# Altium PCB HalfPCB1.PcbDoc
Units mm, origin at the board's own origin, x right, y up, seen from the top; angles counter-clockwise.
Board outline 50 x 25 mm, 4 copper layers (Top Layer, Mid-Layer 1, Mid-Layer 2, Bottom Layer); 35 components, 0 nets, 135 pads, 64 vias.
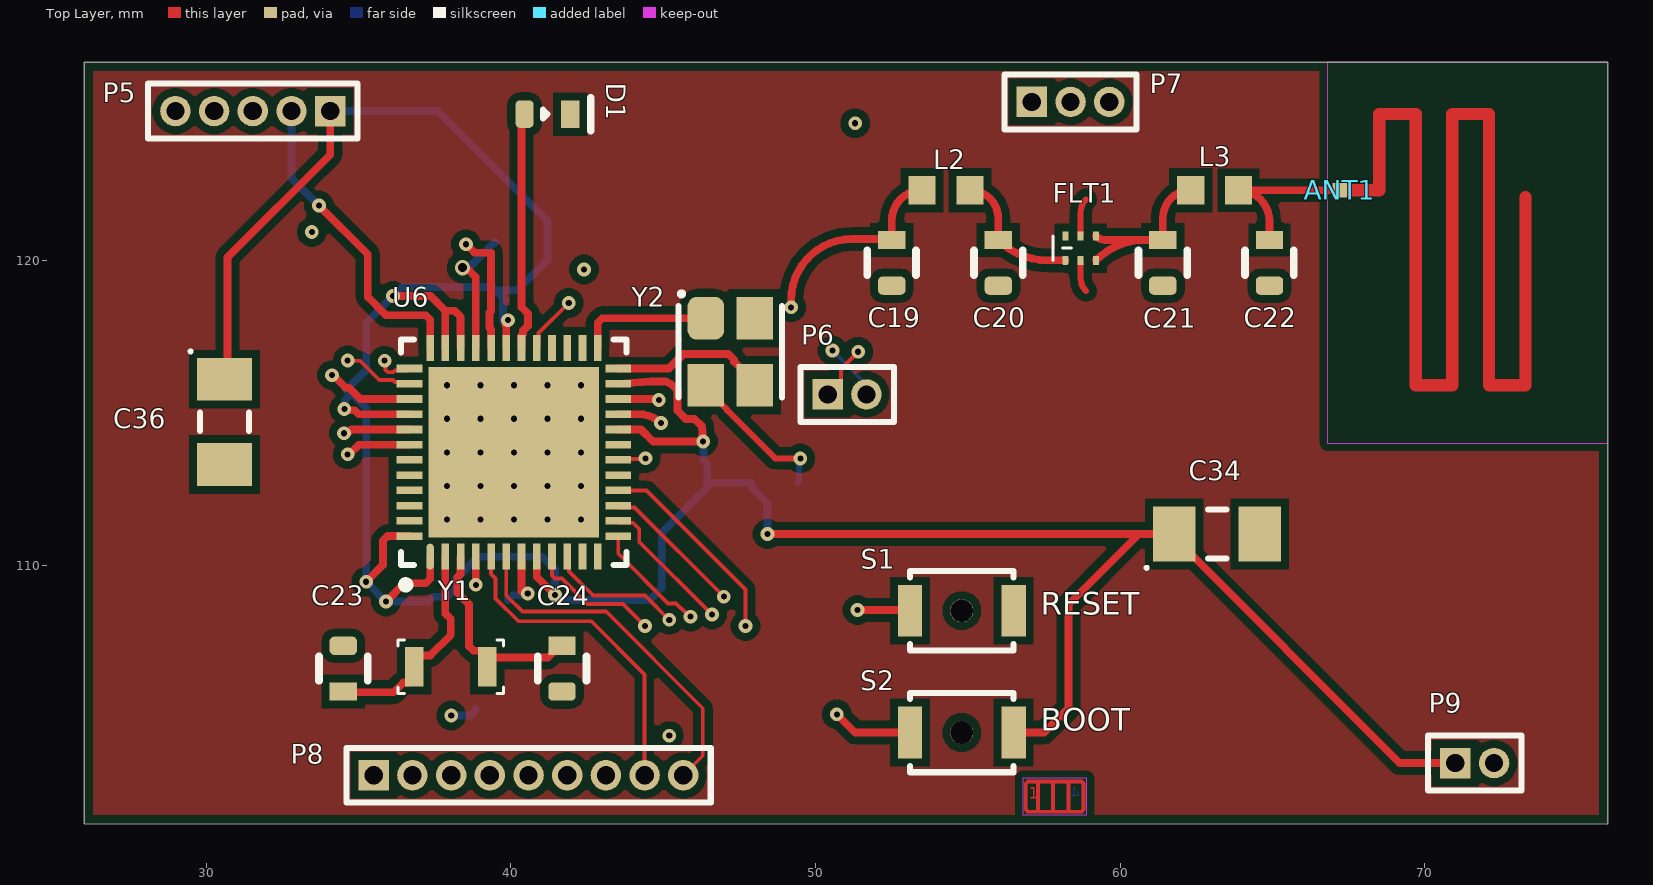
[diagram p0: Top Layer view]
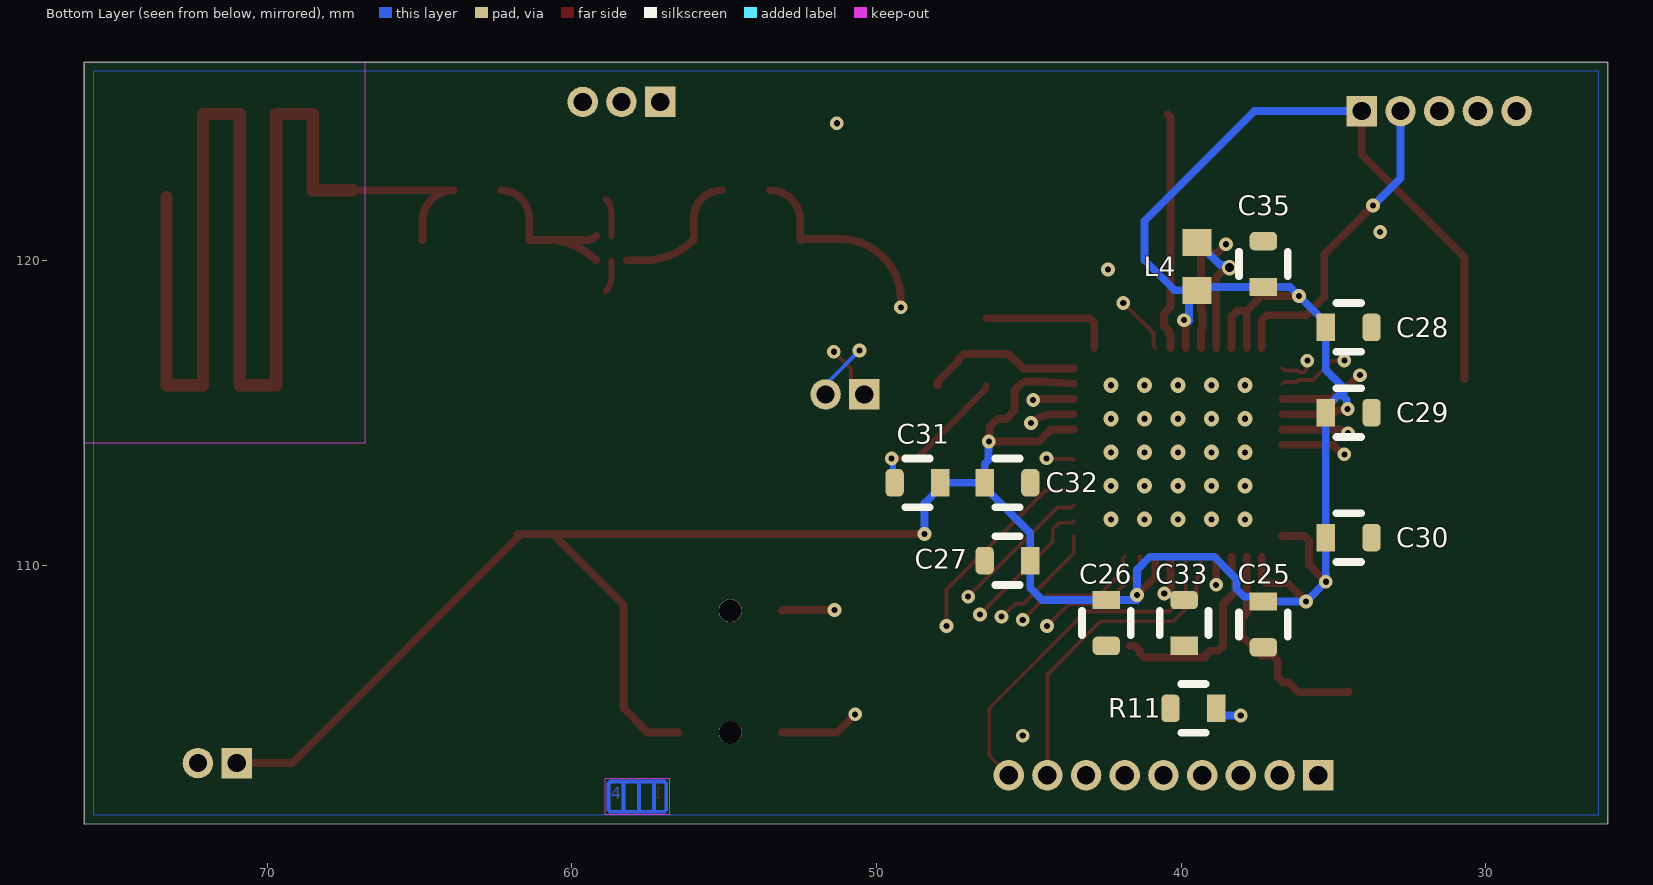
[diagram p1: Bottom Layer view, seen from below]
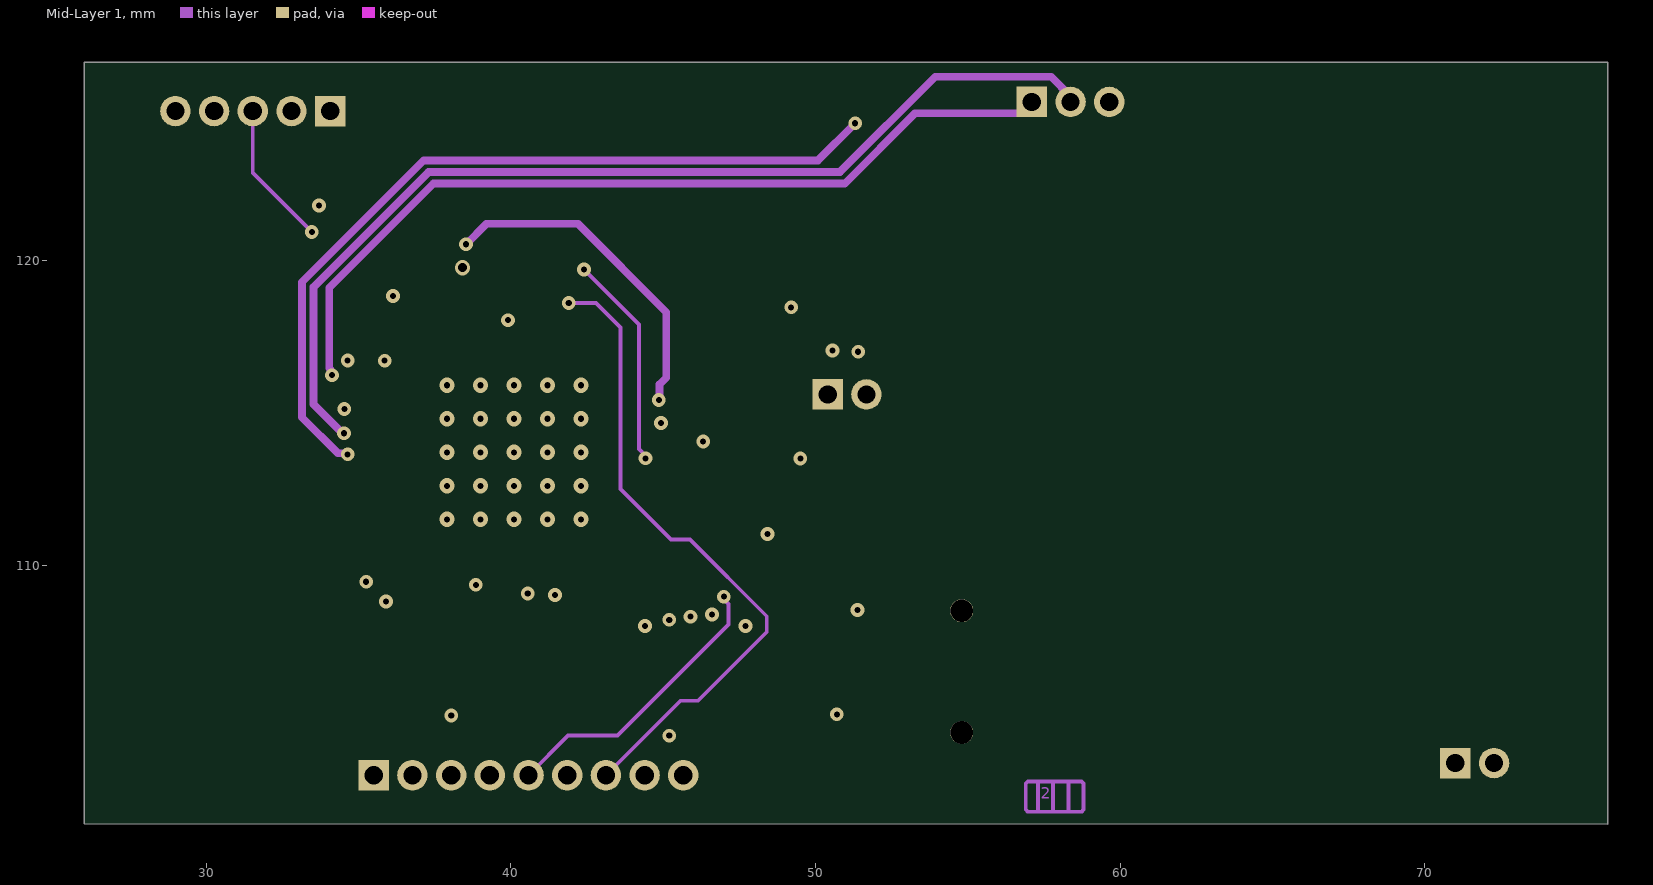
[diagram p2: Mid-Layer 1]
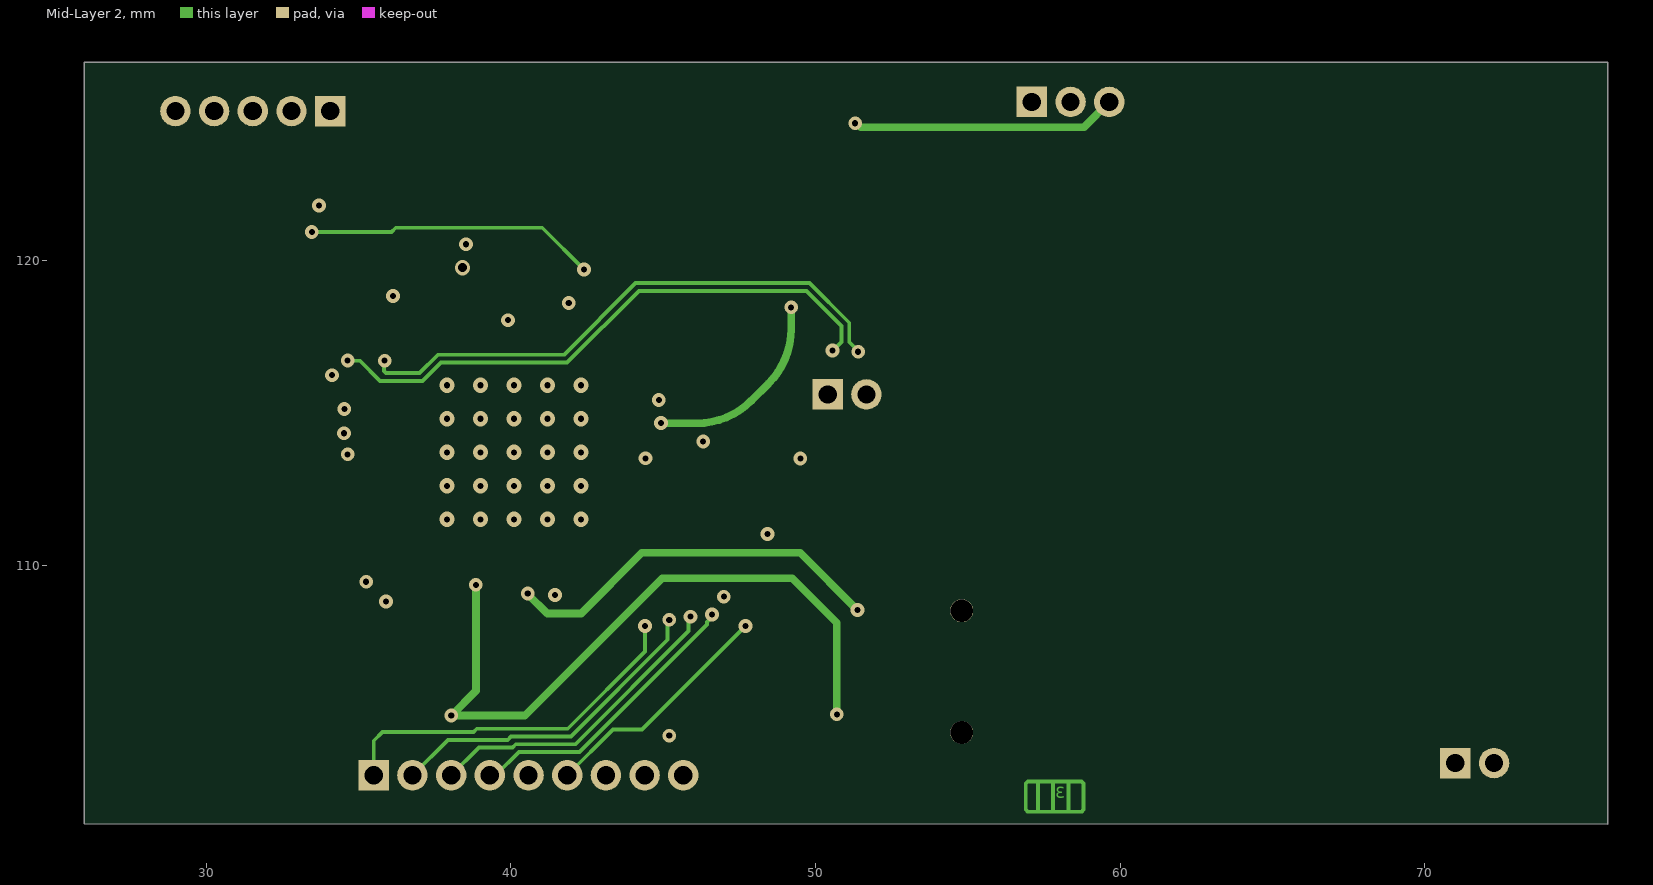
[diagram p3: Mid-Layer 2]

## Layer stack, top to bottom
Top Solder: solder mask 0.0102, Solder Resist, Dk 3.5
Top Layer: signal copper 0.0356
Dielectric 1: dielectric 0.32, FR-4, Dk 4.8
Mid-Layer 1: signal copper 0.0356
Dielectric2: dielectric 0.32, FR-4, Dk 4.8
Mid-Layer 2: signal copper 0.0356
Dielectric3: dielectric 0.32, FR-4, Dk 4.8
Bottom Layer: signal copper 0.0356
Bottom Solder: solder mask 0.0102, Solder Resist, Dk 3.5

## Board outline
26,101.5 76,101.5 76,126.5 26,126.5

## Design rules (kind name [scope] priority, off if disabled: settings)
Clearance [All] p1: gap=0.254 ignorepadtopadclearanceinfootprint=FALSE except(0: Arc-Hole Track-Hole SMDPad-Hole THPad-Hole Via-Hole Fill-Hole Poly-Hole Region-Hole Text-Hole)
PolygonConnect [All] p1: connectstyle=Relief reliefconductorwidth=0.254 reliefentries=4 polygonreliefangle="90 Angle" airgapwidth=0.254
RoomDefinition U_STM32WB55 [InComponentClass('U_STM32WB55')] p1: confinementstyle=ConfineIn formatcopy=TRUE lockcomponents=FALSE outline 25.9,101.8 73.8,101.8 73.8,126.5 25.9,126.5
RoutingVias [All] p1: holewidth=0.711 width=1.27 viastyle="Through Hole" minholewidth=0.711 minwidth=1.27 maxholewidth=0.711 maxwidth=1.27
SolderMaskExpansion [All] p1: expansion=0.102 istentingtop=FALSE
Width [All] p1: maxlimit=0.254 minlimit=0.254 preferedwidth=0.254
30 further rules are at their usual default settings.

## Components (designator, comment, footprint, x,y, rotation, side; value= is the part's Value field where it differs from the comment)
ANT1 "Meander Antenna 2.4GHz" Meander2.4G 67.2,122.3 r270 top
C19 "0.8pF" C_0603 52.5,119.921 r90 top
C20 "0.3pF" C_0603 56,119.921 r90 top
C21 "Not Fitted" C_0603 61.4,119.921 r90 top
C22 "1.2pF" C_0603 64.9,119.921 r90 top
C23 "20pF" C_0603 34.5,106.6 r270 top
C24 "20pF" C_0603 41.679,106.6 r90 top
C25 "100nF" C_0603 37.3,108.05 r90 bottom
C26 "100nF" C_0603 42.454,108.1 r90 bottom
C27 "100nF" C_0603 45.7,110.146 r180 bottom
C28 "100nF" C_0603 34.5,117.8 r0 bottom
C29 "100nF" C_0603 34.5,115 r0 bottom
C30 "100nF" C_0603 34.5,110.9 r0 bottom
C31 "100nF" C_0603 48.654,112.7 r180 bottom
C32 "100pF" C_0603 45.7,112.7 r0 bottom
C33 "100nF" C_0603 39.9,108.1 r270 bottom
C34 "4.7uF" C_1206 63.179,111.021 r180 top
C35 "100nF" C_0603 37.3,119.879 r270 bottom
C36 "4.7uF" C_1206 30.6,114.7 r90 top
D1 "RED" D-0603 41.2,124.8 r0 top
FLT1 "LFB182G45BG4D268" LFB182G45BG4D268 58.7,120.4 r0 top
L2 "2.7nH" L-0603 54.285,122.3 r0 top
L3 "3.6nH" L-0603 63.1,122.3 r0 top
L4 "10uH" L-0603 39.479,119.8 r270 bottom
P5 "Programmer" MHDR1X5 34.07,124.9 r180 top
P6 "UART" MHDR1X2 50.4,115.6 r0 top
P7 "BAT" MHDR1X3 57.1,125.2 r0 top
P8 "MHDR1X9" MHDR1X9 35.5,103.1 r0 top
P9 "PWR" MHDR1X2 71,103.5 r0 top
R11 "10K" C_0603 39.6,105.296 r180 bottom
S1 "NRESET" B3U-1000P-B 54.8,108.5 r0 top
S2 "BOOT" B3U-1000P-B 54.8,104.5 r0 top
U6 "STM32WB55Cx" QFN48P50S700x700EP560x560 40.1,113.7 r90 top
Y1 "32.768kHz" ECX-31B 38.027,106.665 r0 top
Y2 "32MHz" Y_3225 47.2,117 r270 top

## Footprints (in the part's own frame and the unit in brackets; to place one, negate y for a bottom-side part, rotate by r counter-clockwise, add the part's x,y. Pads: shape width x height; smd on the part's side, far side on the other; paste and mask are expansions set on the pad)
B3U-1000P-B [mm] "tactile Switch"
  rect 0.8x1.7 smd: 1(-1.7,0) 2(1.7,0)
  round 0.75 hole 0.75: ""(0,0)
  silkscreen extent -1.7,-1.3 1.7,1.3, body extent -2,-1.25 2,1.25, height 1.6
C_0603 [mm] "0603 package for CAP"
  rrect50% 0.6x0.9 smd: 1(-0.75,0)
  rect 0.6x0.9 smd: 2(0.75,0)
  silkscreen extent -0.4,-0.8 0.4,0.8, body extent -0.8,-0.4 0.8,0.4, height 0.5
C_1206 [mm]
  rect 1.4x1.8 smd: 1(-1.4,0) 2(1.4,0)
  silkscreen extent -0.3,-0.8 2.36,1.16, body extent -1.75,-0.9 1.75,0.9, height 1.6
D-0603 [mm] "0603 package for LED"
  rrect50% 0.6x0.9 smd: 1(-0.75,0)
  rect 0.6x0.9 smd: 2(0.75,0)
  silkscreen extent -0.15,-0.54 1.42,0.54, body extent -0.83,-0.36 0.83,0.37, height 0.68
ECX-31B [mm] "Crystal Oscillator 2Pins 3.2x1.5"
  rect 0.6x1.3 smd: 1(-1.2,0) 2(1.2,0)
  silkscreen extent -1.73,-0.87 1.73,0.87, body extent -1.6,-0.75 1.6,0.75, height 0.9
L-0603 [mm] "Chip Inductor, 2-Leads, Body 1.60x0.80mm, IPC Medium Density"
  rect 0.89x0.94 smd: 1(-0.785,0) 2(0.785,0)
  body extent -0.85,-0.45 0.85,0.45, height 0.95
LFB182G45BG4D268 [mm]
  rrect50% 0.2x0.3 smd: 1(-0.5,-0.4)
  rect 0.2x0.3 smd: 2(0,-0.4) 3(0.5,-0.4) 4(0.5,0.4) 5(0,0.4) 6(-0.5,0.4)
  silkscreen extent -0.9,-0.4 -0.3,0.4, body extent -0.8,-0.4 0.8,0.4, height 0.39
Meander2.4G [mm]
  rect 0.48x0.48 smd mask+0.05: 1(0,0)
  Top Layer lines w0.4: 0,0 0,1.3 -2.5,1.3 -2.5,2.5 6.4,2.5 6.4,3.7 -2.5,3.7 -2.5,4.9 6.4,4.9 6.4,6.1 0.225,6.1
MHDR1X2 [mm] "Connector; Header; 2 Position"
  rect 1x1 hole 0.6: 1(0,0)
  round 1 hole 0.6: 2(1.27,0)
  silkscreen extent -0.9,-0.9 2.17,0.9
MHDR1X3 [mm] "Connector; Header; 3 Position"
  rect 1x1 hole 0.6: 1(0,0)
  round 1 hole 0.6: 2(1.27,0) 3(2.54,0)
  silkscreen extent -0.9,-0.9 3.44,0.9
MHDR1X5 [mm] "Connector; Header; 5 Position"
  rect 1x1 hole 0.6: 1(0,0)
  round 1 hole 0.6: 2(1.27,0) 3(2.54,0) 4(3.81,0) 5(5.08,0)
  silkscreen extent -0.9,-0.9 5.98,0.9
MHDR1X9 [mm] "Connector; Header; 9 Position"
  rect 1x1 hole 0.6: 1(0,0)
  round 1 hole 0.6: 2(1.27,0) 3(2.54,0) 4(3.81,0) 5(5.08,0) 6(6.35,0) 7(7.62,0) 8(8.89,0) 9(10.16,0)
  silkscreen extent -0.9,-0.9 11.06,0.9
QFN48P50S700x700EP560x560 [mm] "QFN, 48-Leads, Body 7.00x7.00mm, Pitch 0.50mm, Thermal Pad 5.60x5.60mm, IPC Medium Density"
  oval 0.85x0.25 smd: 1(-3.425,2.75)
  rect 0.85x0.25 smd: 2(-3.425,2.25) 3(-3.425,1.75) 4(-3.425,1.25) 5(-3.425,0.75) 6(-3.425,0.25) 7(-3.425,-0.25) 8(-3.425,-0.75) 9(-3.425,-1.25) 10(-3.425,-1.75) 11(-3.425,-2.25) 12(-3.425,-2.75) 25(3.425,-2.75) 26(3.425,-2.25) 27(3.425,-1.75) 28(3.425,-1.25) 29(3.425,-0.75) 30(3.425,-0.25) 31(3.425,0.25) 32(3.425,0.75) 33(3.425,1.25) 34(3.425,1.75) 35(3.425,2.25) 36(3.425,2.75)
  rect 0.25x0.85 smd: 13(-2.75,-3.425) 14(-2.25,-3.425) 15(-1.75,-3.425) 16(-1.25,-3.425) 17(-0.75,-3.425) 18(-0.25,-3.425) 19(0.25,-3.425) 20(0.75,-3.425) 21(1.25,-3.425) 22(1.75,-3.425) 23(2.25,-3.425) 24(2.75,-3.425) 37(2.75,3.425) 38(2.25,3.425) 39(1.75,3.425) 40(1.25,3.425) 41(0.75,3.425) 42(0.25,3.425) 43(-0.25,3.425) 44(-0.75,3.425) 45(-1.25,3.425) 46(-1.75,3.425) 47(-2.25,3.425) 48(-2.75,3.425)
  rect 5.6x5.6 smd: 49(0,0)
  silkscreen extent -4.47,-3.7 3.7,3.7, body extent -3.55,-3.55 3.55,3.55, height 0.6
Y_3225 [mm] "Crystal, 4-Leads, Body 2.50x3.20mm, Pitch 2.20mm, IPC Low Density"
  rrect50% 1.4x1.2 smd: 1(-1.1,-0.8)
  rect 1.4x1.2 smd: 2(1.1,-0.8) 3(1.1,0.8) 4(-1.1,0.8)
  silkscreen extent -1.95,-1.7 1.5,1.7, body extent -1.6,-1.25 1.6,1.25, height 0.61

## Part data
ANT1: "PCB TRACE / DONT TRY TO LOOK FOR PARTS"
C19 C20 C21 C22 C23 C24 C25 C26 C27 C28 C29 C30 C31 C32 C33 C34 C35 C36: library part Cap, "Capacitor", LatestRevisionDate=17-Jul-2002, LatestRevisionNote="Re-released for DXP Platform.", PackageDescription="Radial Cap, Thru-Hole; 2 Leads; 0.3 in Pin Spacing", PackageReference=RAD-0.3, Published=8-Jun-2000, Publisher="Altium Limited"
D1: library part LED2, "Typical RED, GREEN, YELLOW, AMBER GaAs LED", LatestRevisionDate=17-Jul-2002, LatestRevisionNote="Re-released for DXP Platform.", PackageDescription="SM LED; 2 Flat Leads", PackageReference=3.2X1.6X1.1, PackageVersion=Feb-2002, Published=8-Jun-2000, Publisher="Altium Limited"
FLT1: "Ultra-small, low-profiled, lightweight band-pass filters."
L2 L3 L4: library part Inductor, "Inductor", Code_IEC=1005, Code_JEITA=0402, LatestRevisionDate=29-May-2009, LatestRevisionNote="IPC-7351 Footprint Added.", PackageDescription="Chip Inductor", PackageReference=0402-A, Published=8-Jun-2000, Publisher="Altium Limited"
P5: library part MHDR1X5, "Header, 5-Pin", LatestRevisionDate=17-Jul-2002, LatestRevisionNote="Re-released for DXP Platform.", Publisher="Altium Limited"
P6 P9: library part MHDR1X2, "Header, 2-Pin", LatestRevisionDate=17-Jul-2002, LatestRevisionNote="Re-released for DXP Platform.", Publisher="Altium Limited"
P7: library part MHDR1X3, "Header, 3-Pin", LatestRevisionDate=17-Jul-2002, LatestRevisionNote="Re-released for DXP Platform.", Publisher="Altium Limited"
P8: "Header, 9-Pin", LatestRevisionDate=17-Jul-2002, LatestRevisionNote="Re-released for DXP Platform.", Publisher="Altium Limited"
R11: library part Res1, "Resistor", LatestRevisionDate=17-Jul-2002, LatestRevisionNote="Re-released for DXP Platform.", PackageDescription="Axial Device, Thru-Hole; 2 Leads; 0.3 in Pin Spacing", PackageReference=AXIAL-0.3, Published=8-Jun-2000, Publisher="Altium Limited"
S1 S2: library part SW-SPST, "Single-Pole, Single-Throw Switch", LatestRevisionDate=17-Jul-2002, LatestRevisionNote="Re-released for DXP Platform.", PackageDescription="Switch; 2 Leads", PackageReference=SPST-2, Published=24-Mar-1999, Publisher="Altium Limited"
U6: "Multiprotocol wireless 32-bit MCU Arm®-based Cortex®-M4 with FPU, Bluetooth® 5 and 802.15.4 radio solution"
Y1: library part "XTAL 3215"
Y2: library part "XTAL 3225 2_4GND"

## Via types
v1: diameter 0.45, hole 0.2, Top Layer to Bottom Layer, tented both sides, 37 vias
v2: diameter 0.5, hole 0.2, Top Layer to Bottom Layer, 25 vias
v3: diameter 0.5, hole 0.3, Top Layer to Bottom Layer, tented both sides, 1 vias
v4: diameter 0.45, hole 0.2, Top Layer to Bottom Layer, 1 vias

## Nets (pads, with @x,y where several pads share a name; then routed paths per layer and width w, separated by ;. In a path a pad name is that pad's centre, name@x,y a point inside that pad or via, vN(x,y) a via of type N, cw(c..) or ccw(c..) an arc to the next point about the centre after c; other vN are vias at no path point)
pads on no net: ANT1.1 C19.1 C19.2 C20.1 C20.2 C21.1 C21.2 C22.1 C22.2 C23.1 C23.2 C24.1 C24.2 C25.1 C25.2 C26.1 C26.2 C27.1 C27.2 C28.1 C28.2 C29.1 C29.2 C30.1 C30.2 C31.1 C31.2 C32.1 C32.2 C33.1 C33.2 C34.1 C34.2 C35.1 C35.2 C36.1 C36.2 D1.1 D1.2 FLT1.1 FLT1.2 FLT1.3 FLT1.4 FLT1.5 FLT1.6 L2.1 L2.2 L3.1 L3.2 L4.1 L4.2 P5.1 P5.2 P5.3 P5.4 P5.5 P6.1 P6.2 P7.1 P7.2 P7.3 P8.1 P8.2 P8.3 P8.4 P8.5 P8.6 P8.7 P8.8 P8.9 P9.1 P9.2 R11.1 R11.2 S1. S1.1 S1.2 S2. S2.1 S2.2 U6.1 U6.2 U6.3 U6.4 U6.5 U6.6 U6.7 U6.8 U6.9 U6.10 U6.11 U6.12 U6.13 U6.14 U6.15 U6.16 U6.17 U6.18 U6.19 U6.20 U6.21 U6.22 U6.23 U6.24 U6.25 U6.26 U6.27 U6.28 U6.29 U6.30 U6.31 U6.32 U6.33 U6.34 U6.35 U6.36 U6.37 U6.38 U6.39 U6.40 U6.41 U6.42 U6.43 U6.44 U6.45 U6.46 U6.47 U6.48 U6.49 Y1.1 Y1.2 Y2.1 Y2.2 Y2.3 Y2.4
copper on no net: | length 602.1
  Top Layer w0.127: v1(34.644,116.713) 34.653,116.704 35.049,116.704 35.679,116.073 36.129,116.073 36.191,116.012 36.614,116.012 36.675,115.95 ; v1(35.856,116.707) 35.884,116.679 35.884,116.401 35.958,116.327 36.129,116.327 36.191,116.388 36.614,116.388 36.675,116.45 ; 39.35,110.275 39.35,109.707 39.5,109.557 39.5,108.9 40.247,108.153 42.647,108.153 44.39,106.41 44.39,103.1 ; 39.85,110.275 39.85,108.999 39.925,108.924 40.378,108.471 43.129,108.471 46.3,105.3 46.3,103.74 45.66,103.1 ; 40.85,117.125 40.912,117.187 40.912,117.612 v1(41.9,118.6) ; 41.35,110.275 41.35,109.66 41.454,109.556 41.675,109.556 42.506,108.725 43.675,108.725 v1(44.4,108) ; 41.85,110.275 41.912,110.214 41.912,109.791 42.702,109 44.4,109 v1(45.2,108.2) ; 43.525,110.95 43.525,110.375 45.157,108.743 45.425,108.743 45.742,108.425 45.742,108.306 v1(45.896,108.306) ; 43.525,111.45 43.587,111.388 44.009,111.388 44.214,111.184 44.214,110.902 44.214,110.762 v1(46.6,108.375) ; 43.525,111.95 43.587,111.889 44.063,111.889 v1(46.991,108.961) ; 43.525,112.45 44.45,112.45 47.7,109.2 v1(47.7,108) ; 43.525,113.45 43.55,113.475 44.394,113.475 v1(44.419,113.501) ; 50.4,115.6 50.837,116.037 50.837,116.437 v1@51.3,116.9 ; 57.8,101.95 57.8,102.2 57.8,102.85 ; 57.3,101.9 57.8,101.9 58.3,101.9 ; 57.3,101.9 56.974,101.9 56.9,101.974 56.9,102.826 56.974,102.9 57.3,102.9 ; 57.3,101.9 57.3,102.9 ; 57.3,102.9 57.8,102.9 58.3,102.9 ; 58.3,101.9 58.726,101.9 58.8,101.974 58.8,102.826 58.726,102.9 58.3,102.9 ; 58.3,101.9 58.3,102.9
  Top Layer w0.2: 46.4,115.9 46.4,115.8 47.1,115.1 47.1,115.076 48.676,113.5 v1(49.5,113.5) ; 58.7,120 58.7,119.423 ccw(c59.298,119.423) 58.875,119 ; 58.7,120.8 58.7,121.577 cw(c59.298,121.577) 58.875,122
  Top Layer w0.254: 30.7,116.1 30.7,120.1 34.07,123.47 34.07,124.9 ; v1(33.7,121.8) 35.3,120.2 35.3,118.8 35.9,118.2 37.201,118.2 37.35,118.051 37.35,117.125 ; v1(34.129,116.234) 34.165,116.234 34.575,115.823 34.688,115.823 35.061,115.45 36.675,115.45 ; 34.5,105.85 34.525,105.825 36.151,105.825 36.468,106.142 36.654,106.142 36.827,106.315 36.827,106.86 37,107.033 37.359,107.033 38.027,107.701 38.027,108.232 37.85,108.409 37.85,110.275 ; v1(34.526,114.327) 34.637,114.327 34.76,114.45 36.675,114.45 ; v1(34.534,115.119) 34.572,115.082 34.879,115.082 35.009,114.952 36.673,114.952 36.675,114.95 ; v1(34.644,113.633) 34.697,113.633 35.014,113.95 36.675,113.95 ; v1(35.25,109.45) 35.8,110 35.8,110.8 35.95,110.95 36.675,110.95 ; v1(35.9,108.8) 36.5,109.4 37.201,109.4 37.35,109.549 37.35,110.275 ; v1(36.129,118.829) 37.371,118.829 37.85,118.35 ; 37.85,117.125 37.85,118.35 ; 38.35,110.275 38.35,109.707 38.244,109.601 38.244,109.099 38.627,108.716 38.627,107.336 38.776,107.188 39.054,107.188 39.227,107.015 39.227,106.962 41.207,106.962 41.356,107.11 41.356,107.177 41.529,107.35 41.679,107.35 ; 38.35,117.125 38.35,118.15 38.15,118.35 37.85,118.35 ; v3(38.411,119.76) 38.46,119.76 38.5,119.8 38.85,119.45 38.85,117.125 ; v1(38.53,120.528) 38.809,120.25 39.35,120.25 39.35,118.34 39.298,118.288 39.298,117.786 39.35,117.734 39.35,117.125 ; v1(38.85,109.35) 38.85,110.275 ; 39.85,117.125 39.848,117.127 39.848,117.843 39.823,117.867 39.949,117.993 v1(39.904,118.037) ; 40.35,110.275 40.35,109.146 40.396,109.1 40.516,109.1 v1(40.554,109.062) ; 40.35,117.125 40.352,117.127 40.352,117.539 40.398,117.585 40.398,117.685 40.562,117.849 40.562,118.251 40.352,118.461 40.352,124.702 40.45,124.8 ; 40.85,110.275 40.852,110.273 40.852,109.621 41.45,109.023 v1(41.45,109.013) ; 42.85,117.125 42.85,117.951 42.999,118.1 46.4,118.1 ; 43.525,114.45 44.272,114.45 44.669,114.053 v1(46.31,114.053) 46.275,114.557 46.021,114.795 46.02,114.795 45.743,114.795 45.473,115.065 45.473,115.727 45.25,115.95 45.095,116.026 44.593,116.026 43.525,115.95 ; 43.525,114.95 44.207,114.95 cw(c44.207,113.931) 44.924,114.655 v1(44.927,114.659) ; 43.525,115.45 44.641,115.45 44.826,115.423 ccw(c44.862,115.674) 44.849,115.42 v1(44.858,115.42) ; 43.525,116.45 45.188,116.45 45.665,116.927 47.135,116.927 47.327,116.735 47.327,116.673 48,116 48,115.9 ; v1(48.421,111.021) 61.654,111.021 ; v1(49.2,118.458) 49.2,118.7 cw(c51.2,118.7) 51.2,120.7 52.471,120.7 cw(c52.471,120.671) 52.5,120.671 52.5,121.3 cw(c53.5,121.3) 53.5,122.3 ; v4(50.7,105.1) 51.3,104.5 53.1,104.5 ; v1(51.375,108.525) 53.075,108.525 53.1,108.5 ; 55.07,122.3 cw(c55.07,121.37) 56,121.37 56,120.671 ccw(c57.619,122.29) 57.619,120 58.2,120 ; 56.5,104.5 57.5,104.5 58.3,105.3 58.3,108.7 60.621,111.021 61.654,111.021 ; 59.2,120 cw(c60.819,118.381) 60.819,120.671 ; 59.2,120.8 ccw(c59.512,121.112) 59.512,120.671 60.819,120.671 ; 61.779,111.021 61.654,111.021 ; 62.315,122.3 ccw(c62.315,121.385) 61.4,121.385 61.4,120.671 60.819,120.671 ; 64.9,120.671 64.9,121.285 ccw(c63.885,121.285) 63.885,122.3 67.2,122.3 ; 71,103.5 69.175,103.5 61.654,111.021
  Mid-Layer 1 w0.127: 31.53,124.9 31.53,122.87 v1(33.467,120.933) ; 40.58,103.1 41.88,104.4 43.5,104.4 47.143,108.043 47.143,108.721 46.991,108.873 v1(46.991,108.961) ; v1(41.9,118.6) 42.8,118.6 43.6,117.8 43.6,112.5 45.257,110.843 45.876,110.843 48.4,108.318 48.4,107.8 46.145,105.545 45.565,105.545 43.12,103.1 ; v1(42.4,119.7) 44.2,117.9 44.2,113.807 44.419,113.588 v1(44.419,113.501) ; 57.8,101.95 57.8,102.2 57.8,102.85 ; 57.3,101.9 57.8,101.9 58.3,101.9 ; 57.3,101.9 56.974,101.9 56.9,101.974 56.9,102.826 56.974,102.9 57.3,102.9 ; 57.3,101.9 57.3,102.9 ; 57.3,102.9 57.8,102.9 58.3,102.9 ; 58.3,101.9 58.726,101.9 58.8,101.974 58.8,102.826 58.726,102.9 58.3,102.9 ; 58.3,101.9 58.3,102.9
  Mid-Layer 1 w0.254: v1(34.129,116.234) 34.091,116.271 34.091,116.409 34.038,116.462 34.038,119.099 37.458,122.519 50.958,122.519 53.266,124.827 56.727,124.827 57.1,125.2 ; v1(34.526,114.327) 34.473,114.327 34.287,114.513 34.283,114.513 33.523,115.274 33.523,119.123 37.3,122.9 50.8,122.9 53.927,126.027 57.735,126.027 58.37,125.392 58.37,125.2 ; v1(34.644,113.633) 34.606,113.67 34.326,113.67 33.142,114.854 33.142,119.28 37.142,123.281 50.081,123.281 v1(51.3,124.5) ; v1(38.53,120.528) 39.2,121.198 42.202,121.198 45.1,118.3 45.1,116.153 44.881,115.934 44.881,115.547 cw(c44.627,115.547) 44.874,115.488 v1(44.858,115.42)
  Mid-Layer 2 w0.127: v1(33.467,120.933) 36.086,120.933 36.223,121.071 41.029,121.071 v1(42.4,119.7) ; v1(34.644,116.713) 34.653,116.704 35.049,116.704 35.706,116.046 37.105,116.046 37.705,116.646 41.846,116.646 44.2,119 49.7,119 50.851,117.849 50.851,117.315 50.576,117.04 v1(50.557,117.04) ; 35.5,103.1 35.5,104.233 35.783,104.517 38.77,104.517 38.879,104.626 41.866,104.626 44.4,107.159 v1(44.4,108) ; v1(35.856,116.707) 35.834,116.685 35.834,116.366 35.9,116.3 37,116.3 37.6,116.9 41.741,116.9 44.095,119.254 49.805,119.254 51.105,117.954 51.105,117.315 51.4,117.02 v1(51.4,117) ; 36.77,103.1 37.933,104.263 39.898,104.263 40.007,104.372 41.972,104.372 45.146,107.546 45.146,108.146 v1(45.2,108.2) ; 38.04,103.1 38.949,104.009 40.05,104.009 40.159,104.118 42.118,104.118 45.834,107.834 45.834,108.164 45.936,108.266 v1(45.896,108.306) ; 39.31,103.1 39.5,103.1 40.264,103.864 42.254,103.864 46.439,108.048 46.439,108.126 46.6,108.288 v1(46.6,108.375) ; 41.85,103.1 43.35,104.6 44.3,104.6 v1(47.7,108) ; 57.8,101.95 57.8,102.2 57.8,102.85 ; 57.3,101.9 57.8,101.9 58.3,101.9 ; 57.3,101.9 56.974,101.9 56.9,101.974 56.9,102.826 56.974,102.9 57.3,102.9 ; 57.3,101.9 57.3,102.9 ; 57.3,102.9 57.8,102.9 58.3,102.9 ; 58.3,101.9 58.726,101.9 58.8,101.974 58.8,102.826 58.726,102.9 58.3,102.9 ; 58.3,101.9 58.3,102.9
  Mid-Layer 2 w0.254: v1(38.85,109.35) 38.856,109.344 38.856,105.873 v1(38.042,105.059) 40.459,105.059 44.967,109.567 49.233,109.567 50.7,108.1 v4(50.7,105.1) ; v1(40.554,109.062) 40.554,109.046 40.56,109.046 41.199,108.407 42.307,108.407 44.3,110.4 49.5,110.4 v1(51.375,108.525) ; v1(44.927,114.659) 44.934,114.652 46.099,114.652 ccw(c46.099,117.192) 47.896,115.396 48.456,115.956 ccw(c46.66,117.752) 49.2,117.752 v1(49.2,118.458) ; v1(51.3,124.5) 51.353,124.5 51.48,124.373 58.813,124.373 59.64,125.2
  Bottom Layer w0.127: v1(50.557,117.04) 51.567,116.029 51.67,116.029 51.67,115.6 ; 57.8,101.95 57.8,102.2 57.8,102.85 ; 57.3,101.9 57.3,102.9 ; 57.3,101.9 56.974,101.9 56.9,101.974 56.9,102.826 56.974,102.9 57.3,102.9 ; 57.3,101.9 57.8,101.9 58.3,101.9 ; 57.3,102.9 57.8,102.9 58.3,102.9 ; 58.3,101.9 58.3,102.9 ; 58.3,101.9 58.726,101.9 58.8,101.974 58.8,102.826 58.726,102.9 58.3,102.9
  Bottom Layer w0.2: 49.404,112.7 49.452,112.748 49.452,113.452 v1(49.5,113.5)
  Bottom Layer w0.254: 32.8,124.9 32.8,122.7 v1(33.7,121.8) ; 34.07,124.9 37.6,124.9 41.2,121.3 41.2,120 40.215,119.015 39.479,119.015 39.365,119.129 37.3,119.129 36.429,119.129 35.25,117.95 35.25,116.401 34.6,115.751 34.749,115.602 ; v1(34.534,115.119) 34.567,115.151 34.567,115.42 34.749,115.602 ; v1(38.042,105.059) 38.677,105.059 38.85,105.232 38.85,105.296 ; v3(38.411,119.76) 38.46,119.76 38.5,119.8 38.547,119.847 38.716,119.847 39.454,120.585 39.479,120.585 ; 39.504,119.015 39.822,118.697 39.744,118.697 39.744,118 39.904,118 v1(39.904,118.037) ; 39.9,108.85 40.059,109.009 40.447,109.009 40.501,109.062 v1(40.554,109.062) ; v1(46.31,114.053) 46.325,114.037 46.325,113.447 46.45,113.322 46.45,112.7 ; v1(48.421,111.021) 48.421,112.034 47.904,112.55 47.904,112.7 46.45,112.7 ; v1@49.2,118.404 v1(49.2,118.458) ; 34.749,115.602 34.798,115.602 35.25,115.15 35.25,115 35.25,110.9 v1(35.25,109.45) v1(35.9,108.8) 37.3,108.8 37.456,108.956 37.925,108.956 38.186,109.217 38.186,109.543 38.918,110.275 41.025,110.275 41.45,109.85 v1(41.45,109.013) 41.45,108.85 42.454,108.85 44.55,108.85 44.95,109.25 44.95,110.146 44.95,111.05 46.45,112.55 46.45,112.7
  other v1: 45.2,104.4
  other v2: 37.9,111.5 39,111.5 40.1,111.5 41.2,111.5 42.3,111.5 37.9,112.6 39,112.6 40.1,112.6 41.2,112.6 42.3,112.6 37.9,113.7 39,113.7 40.1,113.7 41.2,113.7 42.3,113.7 37.9,114.8 39,114.8 40.1,114.8 41.2,114.8 42.3,114.8 37.9,115.9 39,115.9 40.1,115.9 41.2,115.9 42.3,115.9

## Polygon pours and split planes (outlines as drawn)
no net on Bottom Layer "NONET_L04_P000" (solid, remove dead copper, pour order 0): 26.3,126.2 75.7,126.2 75.7,101.8 26.3,101.8
no net on Top Layer "NONET_L01_P001" (solid, pour order 1): 26.3,126.2 75.7,126.2 75.7,101.8 26.3,101.8

## Keep-outs
Top Layer:
  rectangle: 66.8,114 76,126.5
  rectangle: 56.8,101.8 58.9,103
Bottom Layer:
  rectangle: 66.8,114 76,126.5
  rectangle: 56.8,101.8 58.9,103

## Other copper
Top Layer:
  text "1" at 57,102.2 h0.64
Mid-Layer 1:
  text "2" at 57.399,102.2 h0.64
Mid-Layer 2:
  text "3" at 58.2,102.207 h0.64
Bottom Layer:
  text "4" at 58.7,102.2 h0.64

## Silkscreen, mask and mechanical layers (free items; w line width, h text height)
Top Overlay:
  text "RESET" at 57.4,108.114 h1.27
  text "BOOT" at 57.4,104.314 h1.27
Board Shape:
  the board outline again, w0.4
V Cut:
  lines w0.4: 76,101.5 76,126.5